# EAGLE board atommc3-th-panel (EAGLE 9.5.2)
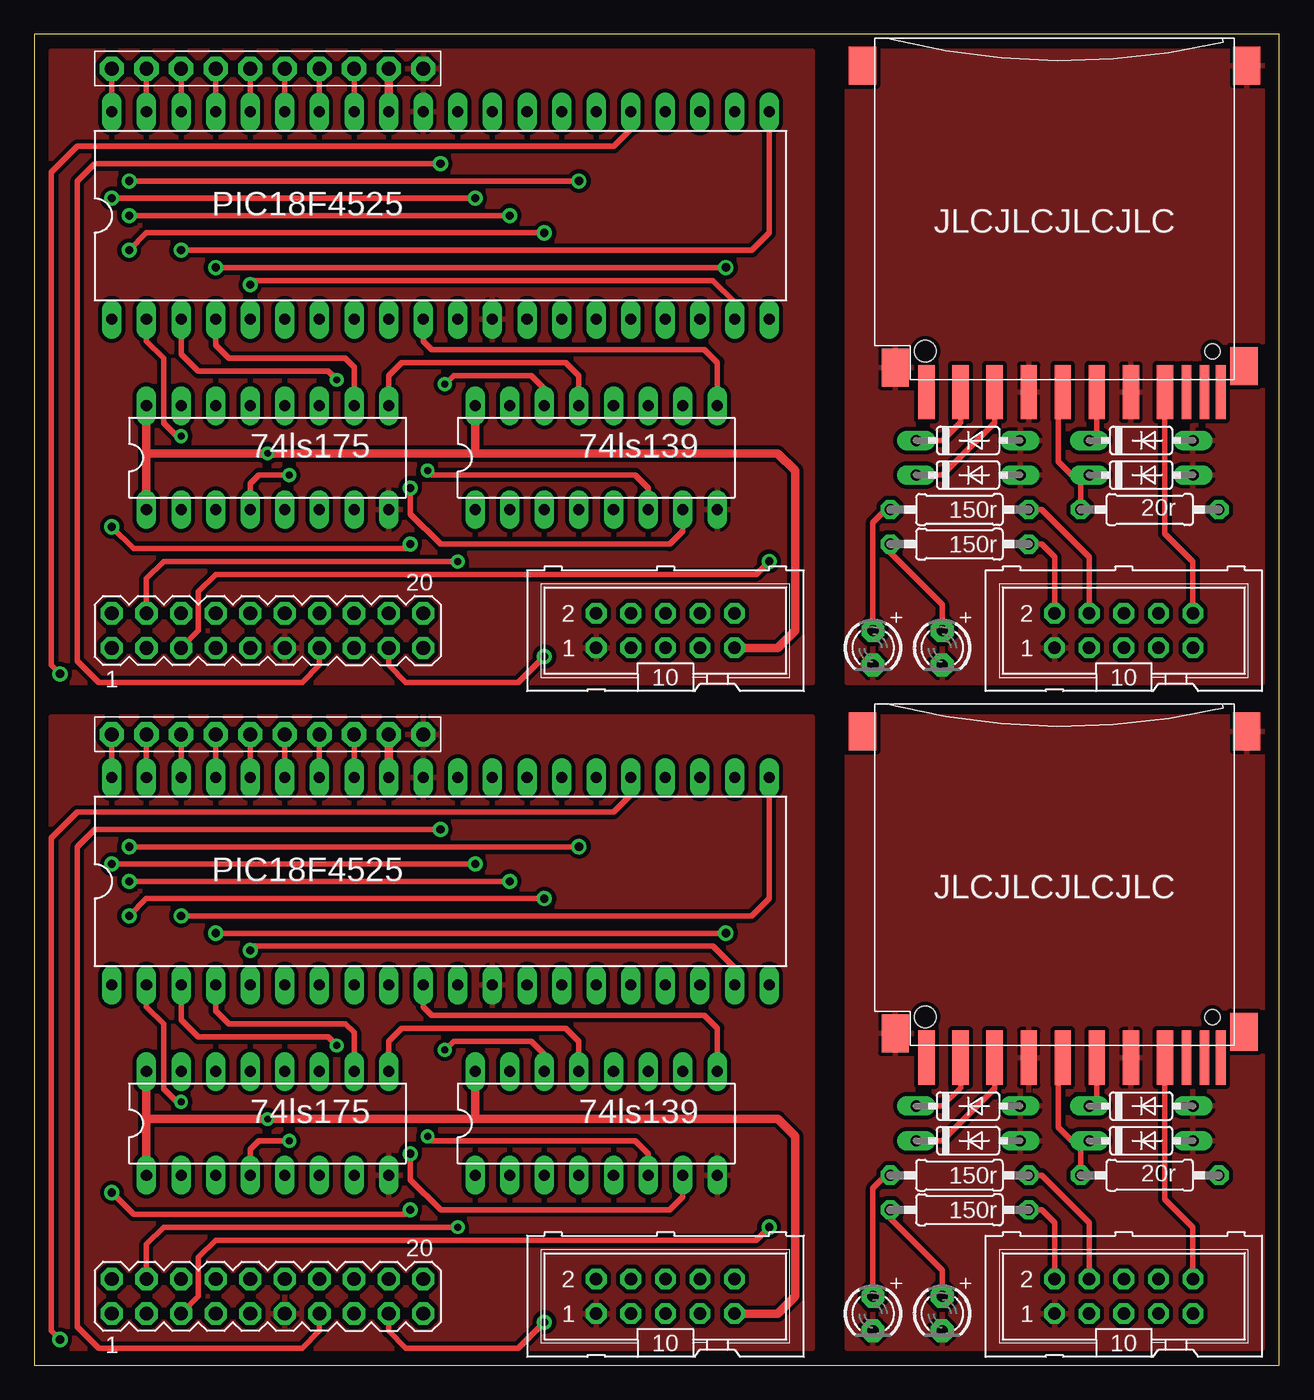
[diagram p0: board, top side]
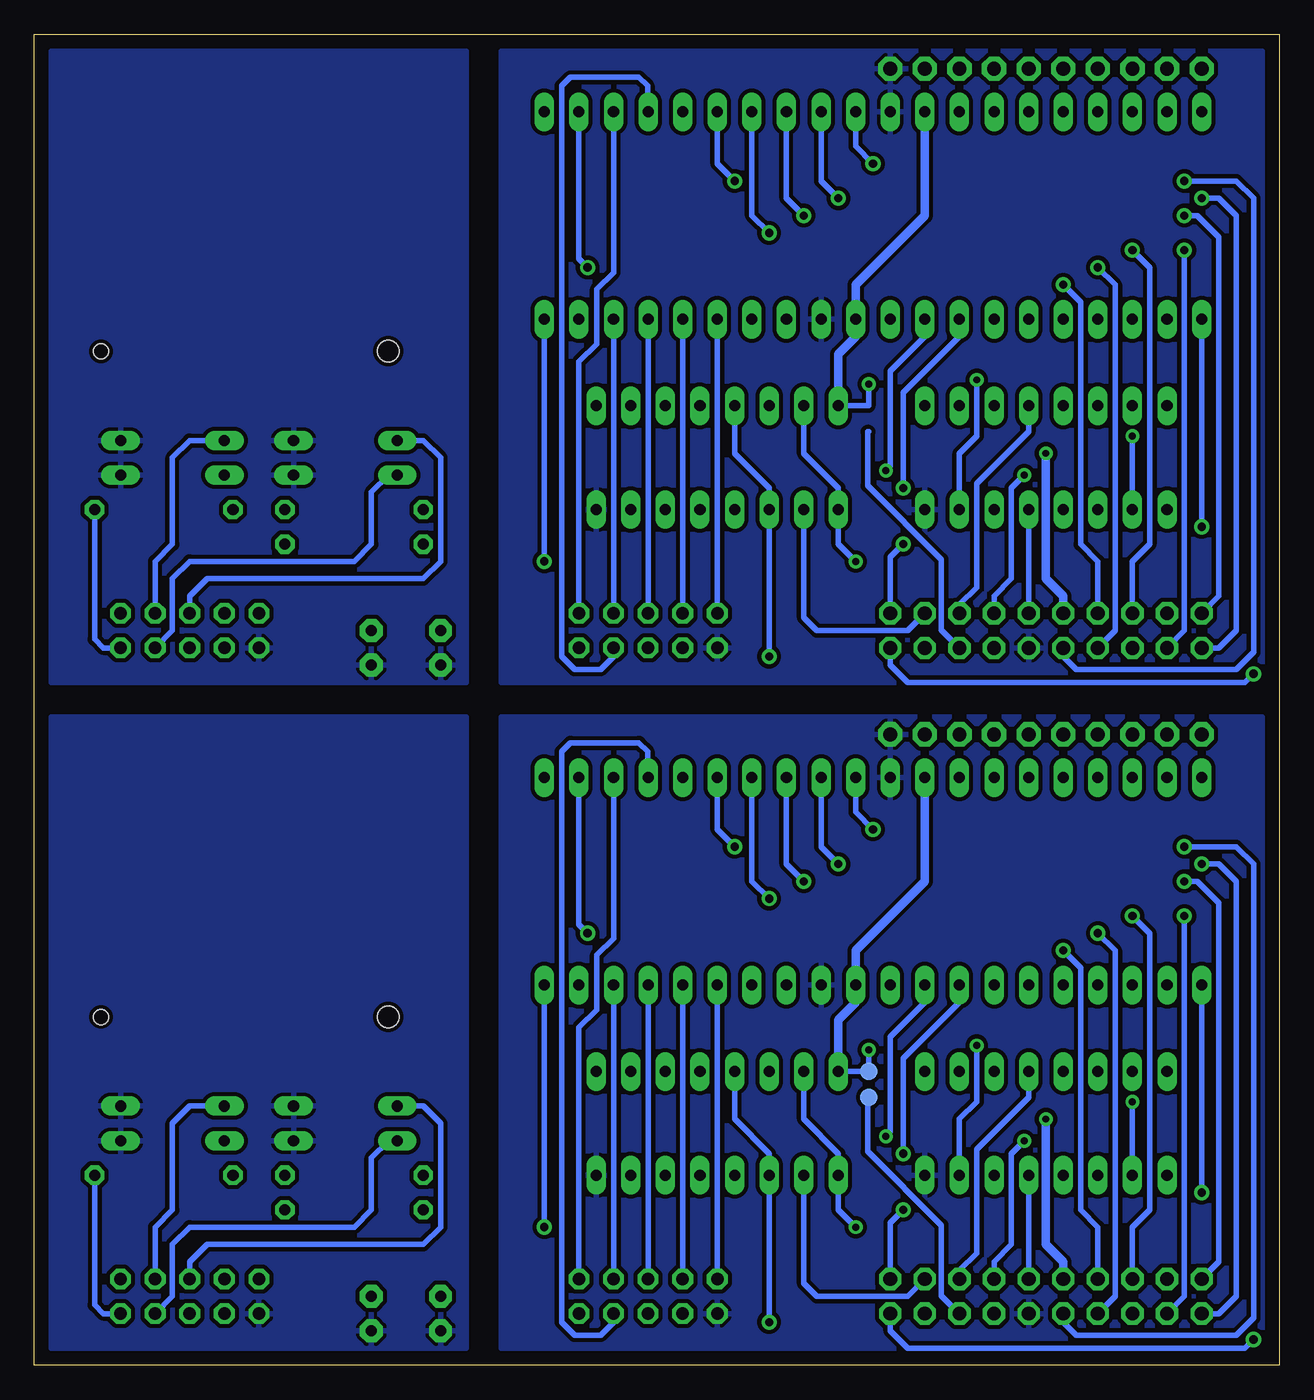
[diagram p1: board, bottom side, seen from below]

Size 91.44 x 97.79 mm. Coordinates in mm from the lower left corner, seen from the top.
Outline: 0,48.9 0,0 91.44,0 91.44,48.9 91.44,97.79 0,97.79 0,48.9
Copper layers (1*16): Top 0.035mm / dielectric 1.5mm / Bottom 0.035mm
Design rules "SparkFun": minimum track width 8mil, minimum drill 20mil, track to track 8mil, track to pad 8mil, pad to pad 8mil, via to via 8mil, smd to smd 8mil, copper to edge 10mil, drill to drill 8mil, minimum pad ring 12mil, minimum via ring 10mil, stop-mask expansion 4mil, vias tented up to drill 25mil, thermal gap 10mil

## Footprints (pad centres in the part's own frame; a part is rotated, then mirrored left to right if it is on the bottom)
DIODE_DO35-7 = drill 0.813 long: A 3.81,0; C -3.81,0
DIL16 = drill 0.813 long: 1 -8.89,-3.81; 2 -6.35,-3.81; 3 -3.81,-3.81; 4 -1.27,-3.81; 5 1.27,-3.81; 6 3.81,-3.81; 7 6.35,-3.81; 8 8.89,-3.81; 9 8.89,3.81; 10 6.35,3.81; 11 3.81,3.81; 12 1.27,3.81; 13 -1.27,3.81; 14 -3.81,3.81; 15 -6.35,3.81; 16 -8.89,3.81
DIL40 = drill 0.813 long: 1 -24.13,-7.62; 2 -21.59,-7.62; 3 -19.05,-7.62; 4 -16.51,-7.62; 5 -13.97,-7.62; 6 -11.43,-7.62; 7 -8.89,-7.62; 8 -6.35,-7.62; 9 -3.81,-7.62; 10 -1.27,-7.62; 11 1.27,-7.62; 12 3.81,-7.62; 13 6.35,-7.62; 14 8.89,-7.62; 15 11.43,-7.62; 16 13.97,-7.62; 17 16.51,-7.62; 18 19.05,-7.62; 19 21.59,-7.62; 20 24.13,-7.62; 21 24.13,7.62; 22 21.59,7.62; 23 19.05,7.62; 24 16.51,7.62; 25 13.97,7.62; 26 11.43,7.62; 27 8.89,7.62; 28 6.35,7.62; 29 3.81,7.62; 30 1.27,7.62; 31 -1.27,7.62; 32 -3.81,7.62; 33 -6.35,7.62; 34 -8.89,7.62; 35 -11.43,7.62; 36 -13.97,7.62; 37 -16.51,7.62; 38 -19.05,7.62; 39 -21.59,7.62; 40 -24.13,7.62
1X10-BIG = drill 1.016 pad 1.778 octagon: 1 -11.43,0; 2 -8.89,0; 3 -6.35,0; 4 -3.81,0; 5 -1.27,0; 6 1.27,0; 7 3.81,0; 8 6.35,0; 9 8.89,0; 10 11.43,0
LED3MM = drill 0.813 pad 1.676 octagon: A -1.27,0; K 1.27,0
0207/10 = drill 0.813 octagon: 1 -5.08,0; 2 5.08,0
ML10 = drill 0.914 octagon: 1 -5.08,-1.27; 2 -5.08,1.27; 3 -2.54,-1.27; 4 -2.54,1.27; 5 0,-1.27; 6 0,1.27; 7 2.54,-1.27; 8 2.54,1.27; 9 5.08,-1.27; 10 5.08,1.27
B1,27 = smd 1.27 x 1.27: TP 0,0
HEADER-M = drill 1.016 octagon: 1 -11.43,-1.27; 2 -11.43,1.27; 3 -8.89,-1.27; 4 -8.89,1.27; 5 -6.35,-1.27; 6 -6.35,1.27; 7 -3.81,-1.27; 8 -3.81,1.27; 9 -1.27,-1.27; 10 -1.27,1.27; 11 1.27,-1.27; 12 1.27,1.27; 13 3.81,-1.27; 14 3.81,1.27; 15 6.35,-1.27; 16 6.35,1.27; 17 8.89,-1.27; 18 8.89,1.27; 19 11.43,-1.27; 20 11.43,1.27
06132-MOD = smd 1.2 x 4: 1 6.9,13.6; 2 4.4,13.6; 3 1.9,13.6; 4 -0.6,13.6; 5 -3.1,13.6; 6 -5.6,13.6; 7 -8.1,13.6; 9 9.4,13.6 | smd 0.7 x 4: 8 -9.7,13.6; CD -11,13.6; WP -12.2,13.6 | smd 2 x 2.8: GP -14.117,-10.37; GP2 14.1,-10.37; GP3 11.7,11.8; GP4 -13.9,11.7 | hole 1.1: -11.6,10.6 | hole 1.6: 9.5,10.6

## Placement (x,y rotation side)
D1  3v3  [DIODE_DO35-7]  68.58,19.05 0 top
D2  3v3  [DIODE_DO35-7]  81.28,65.41 0 top
D3  3v3  [DIODE_DO35-7]  81.28,19.05 0 top
D4  3v3  [DIODE_DO35-7]  68.58,16.51 0 top
D5  3v3  [DIODE_DO35-7]  68.58,67.94 0 top
D6  3v3  [DIODE_DO35-7]  81.28,67.94 0 top
D7  3v3  [DIODE_DO35-7]  68.58,65.41 0 top
D9  3v3  [DIODE_DO35-7]  81.28,16.51 0 top
IC1  74AC139N  [DIL16]  41.27,17.78 0 top
IC2  74LS175N  [DIL16]  17.14,17.78 0 top
IC3  PIC16F874P  [DIL40]  29.84,84.45 0 top
IC4  PIC16F874P  [DIL40]  29.84,35.56 0 top
IC5  74AC139N  [DIL16]  41.27,66.67 0 top
IC6  74LS175N  [DIL16]  17.14,66.67 0 top
JP1  PINHD-1X10  [1X10-BIG]  17.14,46.35 0 top
JP2  PINHD-1X10  [1X10-BIG]  17.14,95.25 0 top
LED1  [LED3MM]  61.59,3.81 270 top
LED2  [LED3MM]  66.67,3.81 270 top
LED3  [LED3MM]  61.59,52.7 270 top
LED4  [LED3MM]  66.67,52.7 270 top
R1  20r  [0207/10]  67.94,13.97 180 top
R2  20r  [0207/10]  81.92,13.97 180 top
R3  20r  [0207/10]  67.94,11.43 180 top
R4  20r  [0207/10]  81.92,62.87 180 top
R5  20r  [0207/10]  67.94,62.87 180 top
R6  20r  [0207/10]  67.94,60.33 180 top
SV1  [ML10]  46.35,53.98 0 top
SV2  [ML10]  46.35,5.08 0 top
SV3  [ML10]  80.01,5.08 0 top
SV4  [ML10]  80.01,53.98 0 top
TP1  TPB1,27  [B1,27]  30.16,19.68 0 bottom
TP2  TPB1,27  [B1,27]  30.16,21.59 0 bottom
U$1  PL8-HEADER-MALE  [HEADER-M]  17.14,5.08 0 top
U$2  PL8-HEADER-MALE  [HEADER-M]  17.14,53.98 0 top
U$3  SDMMC06132-MOD  [06132-MOD]  74.93,85.09 180 top
U$4  SDMMC06132-MOD  [06132-MOD]  74.93,36.2 180 top

## Library data of the parts
D1-D7 D9 = eagle-ltspice; SPICEMODEL: diode; SPICEPREFIX: D
IC1 IC2 IC5 IC6 = 74xx-eu
IC3 IC4 = microchip
JP1 JP2 LED1-LED4 U$3 U$4 = adafruit
R1-R6 = resistor
SV1-SV4 = con-harting-ml
TP1 TP2 = testpad
U$1 U$2 = atom

## Nets
3V3ISH: D9.C R2.2 U$4.4
3V3ISH1: D2.C R4.2 U$3.4
!B1: IC5.1 IC5.15 U$2.4
!B400: IC1.1 IC1.15 U$1.4
!CD: U$4.CD
!CD1: U$3.CD
!IRQ: IC4.25 U$1.19
!IRQ1: IC3.25 U$2.19
!NMI: IC4.26 U$1.9
!NMI1: IC3.26 U$2.9
!PICEN: IC1.9 IC4.10
!PICEN1: IC3.10 IC5.9
!RD: IC1.7 IC4.8
!RD1: IC3.8 IC5.7
!RST: IC4.1 U$1.20
!RST1: IC3.1 U$2.20
!SS: IC4.17 SV2.6
!SS1: IC3.17 SV1.6
!SS-D: D1.C SV3.6 U$4.1
!SS-D1: D5.C SV4.6 U$3.1
!WR: IC1.6 IC4.9
!WR1: IC3.9 IC5.6
A0: IC2.4 U$1.14
A1: IC2.5 U$1.12
A2: IC2.12 U$1.16
A3: TP1.TP U$1.15
A4: IC6.4 U$2.14
A5: IC6.5 U$2.12
A6: IC6.12 U$2.16
A7: U$2.15
BSY: IC4.16 SV2.4
BSY1: IC3.16 SV1.4
BSY-D: R1.1 SV3.4
BSY-D1: R5.1 SV4.4
CLK: IC4.18 SV2.8
CLK1: IC3.18 SV1.8
CLK-D: D3.C SV3.8 U$4.5
CLK-D1: D6.C SV4.8 U$3.5
D0: IC4.19 U$1.8
D1: IC4.20 U$1.5
D2: IC4.21 U$1.6
D3: IC4.22 U$1.7
D4: IC4.27 U$1.3
D5: IC4.28 U$1.2
D6: IC4.29 U$1.1
D7: IC4.30 U$1.13
D8: IC3.30 U$2.13
D9: IC3.19 U$2.8
D10: IC3.20 U$2.5
D11: IC3.21 U$2.6
D12: IC3.22 U$2.7
D13: IC3.27 U$2.3
D14: IC3.28 U$2.2
D15: IC3.29 U$2.1
ERR: IC4.15 SV2.2
ERR1: IC3.15 SV1.2
ERR-D: R3.1 SV3.2
ERR-D1: R6.1 SV4.2
GND: IC1.8 IC2.8 IC4.12 IC4.31 JP1.10 SV2.1 U$1.11
GND1: IC3.12 IC3.31 IC5.8 IC6.8 JP2.10 SV1.1 U$2.11
GND-D: D1.A D3.A D4.A D9.A LED1.K LED2.K SV3.1 U$4.3 U$4.6 U$4.GP U$4.GP3
GND-D1: D2.A D5.A D6.A D7.A LED3.K LED4.K SV4.1 U$3.3 U$3.6 U$3.GP U$3.GP3
LA0: IC2.2 IC4.2
LA1: IC2.7 IC4.3
LA2: IC2.10 IC4.4
LA3: IC3.2 IC6.2
LA4: IC3.3 IC6.7
LA5: IC3.4 IC6.10
MISO: IC4.23 SV2.10
MISO1: IC3.23 SV1.10
MISO-D: SV3.10 U$4.7
MISO-D1: SV4.10 U$3.7
MOSI: IC4.24 SV2.7
MOSI1: IC3.24 SV1.7
MOSI-D: D4.C SV3.7 U$4.2
MOSI-D1: D7.C SV4.7 U$3.2
N$1: IC4.40 JP1.1
N$2: IC4.39 JP1.2
N$3: IC4.38 JP1.3
N$4: IC4.37 JP1.4
N$5: IC4.36 JP1.5
N$6: IC4.35 JP1.6
N$7: IC4.34 JP1.7
N$8: IC4.33 JP1.8
N$9: LED1.A R1.2
N$10: LED2.A R3.2
N$11: IC3.40 JP2.1
N$12: IC3.39 JP2.2
N$13: IC3.38 JP2.3
N$14: IC3.37 JP2.4
N$15: IC3.36 JP2.5
N$16: IC3.35 JP2.6
N$17: IC3.34 JP2.7
N$18: IC3.33 JP2.8
N$19: LED3.A R5.2
N$20: LED4.A R6.2
OSC1: IC4.13
OSC2: IC4.14
OSC3: IC3.13
OSC4: IC3.14
PHI1: IC5.3 IC5.13 IC6.9 U$2.17
PHI2: IC1.3 IC1.13 IC2.9 U$1.17
R/!WR: IC1.2 U$1.18
R/!WR1: IC5.2 U$2.18
VCC: IC1.14 IC1.16 IC2.1 IC2.16 IC4.11 IC4.32 JP1.9 SV2.9 TP2.TP U$1.10
VCC1: IC3.11 IC3.32 IC5.14 IC5.16 IC6.1 IC6.16 JP2.9 SV1.9 U$2.10
VCC-D: R2.1 SV3.9
VCC-D1: R4.1 SV4.9

## Tracks (layer width: path | path; a pad name or v marks a point on that pad's centre or on a via)
3V3ISH
  Top 0.406: U$4.4 75.21,22.28 75.21,17.5 76.2,16.51 D9.C 76.83,16.51 R2.2
3V3ISH1
  Top 0.406: U$3.4 75.21,71.17 75.21,66.39 76.2,65.41 D2.C 76.83,65.41 R4.2
!B1  (via drill 0.51)
  Top 0.406: U$2.4 8.26,57.78 9.53,59.05 v31.11,59.05
  Bottom 0.406: v31.11,59.05 32.38,60.33 IC5.1 32.38,64.45 34.92,66.99 IC5.15
!B400  (via drill 0.51)
  Top 0.406: U$1.4 8.26,8.89 9.53,10.16 v31.11,10.16
  Bottom 0.406: v31.11,10.16 32.38,11.43 IC1.1 32.38,15.56 34.92,18.1 IC1.15
!IRQ  (via drill 0.6)
  Top 0.406: IC4.25 43.81,41.91 42.55,40.64 3.17,40.64 1.27,38.73 1.27,2.54 v1.91,1.91
  Bottom 0.406: U$1.19 28.57,2.54 27.3,1.27 2.54,1.27 v1.91,1.91
!IRQ1  (via drill 0.6)
  Top 0.406: IC3.25 43.81,90.81 42.55,89.53 3.17,89.53 1.27,87.63 1.27,51.44 v1.91,50.8
  Bottom 0.406: U$2.19 28.57,51.44 27.3,50.16 2.54,50.16 v1.91,50.8
!NMI  (via drill 0.6)
  Top 0.406: v6.99,38.1 v40.01,38.1
  Bottom 0.406: U$1.9 15.88,3.17 14.92,2.22 3.17,2.22 1.91,3.49 1.91,36.83 3.17,38.1 v6.99,38.1 | v40.01,38.1 41.27,39.37 IC4.26
!NMI1  (via drill 0.6)
  Top 0.406: v6.99,87 v40.01,87
  Bottom 0.406: U$2.9 15.88,52.07 14.92,51.12 3.17,51.12 1.91,52.39 1.91,85.72 3.17,87 v6.99,87 | v40.01,87 41.27,88.27 IC3.26
!PICEN
  Top 0.406: IC1.9 50.16,24.77 49.21,25.72 29.21,25.72 28.57,26.35 IC4.10
!PICEN1
  Top 0.406: IC5.9 50.16,73.66 49.21,74.61 29.21,74.61 28.57,75.25 IC3.10
!RD  (via drill 0.6)
  Top 0.406: v27.62,15.56 27.62,13.65 29.84,11.43 46.67,11.43 47.62,12.38 IC1.7
  Bottom 0.406: IC4.8 23.5,26.67 27.62,22.54 v27.62,15.56
!RD1  (via drill 0.6)
  Top 0.406: v27.62,64.45 27.62,62.55 29.84,60.33 46.67,60.33 47.62,61.28 IC5.7
  Bottom 0.406: IC3.8 23.5,75.56 27.62,71.44 v27.62,64.45
!RST  (via drill 0.6)
  Top 0.406: v5.71,12.7 7.3,11.11 27.3,11.11 v27.62,11.43
  Bottom 0.406: v27.62,11.43 28.57,10.48 U$1.20 | v5.71,12.7 IC4.1
!RST1  (via drill 0.6)
  Top 0.406: v5.71,61.59 7.3,60.01 27.3,60.01 v27.62,60.33
  Bottom 0.406: v27.62,60.33 28.57,59.37 U$2.20 | v5.71,61.59 IC3.1
!SS
  Bottom 0.406: IC4.17 SV2.6
!SS1
  Bottom 0.406: IC3.17 SV1.6
!SS-D
  Top 0.406: U$4.1 68.03,20.41 66.67,19.05 D1.C
  Bottom 0.406: SV3.6 80.01,7.62 78.74,8.89 62.87,8.89 61.59,10.16 61.59,17.78 62.87,19.05 D1.C
!SS-D1
  Top 0.406: U$3.1 68.03,69.3 66.67,67.94 D5.C
  Bottom 0.406: SV4.6 80.01,56.52 78.74,57.78 62.87,57.78 61.59,59.05 61.59,66.67 62.87,67.94 D5.C
!WR  (via drill 0.51)
  Top 0.406: v28.89,16.83 29.21,16.51 44.13,16.51 45.09,15.56 IC1.6
  Bottom 0.406: IC4.9 26.04,26.67 28.57,24.13 28.57,17.14 v28.89,16.83
!WR1  (via drill 0.51)
  Top 0.406: v28.89,65.72 29.21,65.41 44.13,65.41 45.09,64.45 IC5.6
  Bottom 0.406: IC3.9 26.04,75.56 28.57,73.03 28.57,66.04 v28.89,65.72
A0  (via drill 0.51)
  Top 0.406: IC2.4 15.88,15.88 16.51,16.51 v18.73,16.51
  Bottom 0.406: U$1.14 20.95,7.62 19.68,8.89 19.68,15.56 v18.73,16.51
A1
  Bottom 0.406: U$1.12 IC2.5
A2
  Bottom 0.406: IC2.12 18.41,19.68 22.23,15.88 22.23,8.26 23.5,6.99 U$1.16
A3
  Bottom 0.406: TP1.TP 30.24,19.68 30.24,15.73 24.82,10.3 24.82,5.13 U$1.15
A4  (via drill 0.51)
  Top 0.406: IC6.4 15.88,64.77 16.51,65.41 v18.73,65.41
  Bottom 0.406: U$2.14 20.95,56.52 19.68,57.78 19.68,64.45 v18.73,65.41
A5
  Bottom 0.406: U$2.12 IC6.5
A6
  Bottom 0.406: IC6.12 18.41,68.58 22.23,64.77 22.23,57.15 23.5,55.88 U$2.16
A7
  Bottom 0.406: 30.16,68.58 30.24,68.58 30.24,64.62 24.82,59.19 24.82,54.03 U$2.15
BSY
  Bottom 0.406: IC4.16 SV2.4
BSY1
  Bottom 0.406: IC3.16 SV1.4
BSY-D
  Top 0.406: R1.1 73.98,13.97 77.47,10.48 SV3.4
BSY-D1
  Top 0.406: R5.1 73.98,62.87 77.47,59.37 SV4.4
CLK
  Bottom 0.406: IC4.18 SV2.8
CLK1
  Bottom 0.406: IC3.18 SV1.8
CLK-D
  Top 0.406: D3.C 78.03,19.61 U$4.5
  Bottom 0.406: D3.C 80.01,19.05 81.28,17.78 81.28,11.43 82.55,10.16 SV3.8
CLK-D1
  Top 0.406: D6.C 78.03,68.5 U$3.5
  Bottom 0.406: D6.C 80.01,67.94 81.28,66.67 81.28,60.33 82.55,59.05 SV4.8
D0  (via drill 0.6)
  Top 0.406: v15.88,30.48 16.19,30.8 49.85,30.8 51.44,29.21 IC4.19
  Bottom 0.406: U$1.8 13.34,10.16 14.61,11.43 14.61,29.21 v15.88,30.48
D1  (via drill 0.61)
  Top 0.406: v53.98,10.16 53.02,9.21 13.34,9.21 12.06,7.94 12.06,5.08 U$1.5
  Bottom 0.406: IC4.20 v53.98,10.16
D2  (via drill 0.6)
  Top 0.406: v10.79,33.02 52.7,33.02 53.98,34.29 IC4.21
  Bottom 0.406: U$1.6 10.79,10.16 9.53,11.43 9.53,31.75 v10.79,33.02
D3  (via drill 0.6)
  Top 0.406: v13.34,31.75 v50.8,31.75
  Bottom 0.406: U$1.7 12.06,5.08 12.06,30.48 v13.34,31.75 | v50.8,31.75 51.44,32.38 IC4.22
D4  (via drill 0.6)
  Top 0.406: v6.99,33.02 8.26,34.29 v37.47,34.29
  Bottom 0.406: U$1.3 6.99,5.08 v6.99,33.02 | v37.47,34.29 38.73,35.56 IC4.27
D5  (via drill 0.6)
  Top 0.406: v6.99,35.56 v34.92,35.56
  Bottom 0.406: U$1.2 4.45,7.62 4.45,33.97 6.03,35.56 v6.99,35.56 | v34.92,35.56 36.2,36.83 IC4.28
D6  (via drill 0.6)
  Top 0.406: v5.71,36.83 v32.38,36.83
  Bottom 0.406: U$1.1 4.45,3.81 3.17,5.08 3.17,35.56 4.45,36.83 v5.71,36.83 | IC4.29 33.66,38.1 v32.38,36.83
D7  (via drill 0.6)
  Top 0.406: U$1.13 20.95,2.54 19.68,1.27 4.76,1.27 3.17,2.86 3.17,38.1 4.45,39.37 v29.84,39.37
  Bottom 0.406: v29.84,39.37 31.11,40.64 IC4.30
D8  (via drill 0.6)
  Top 0.406: U$2.13 20.95,51.44 19.68,50.16 4.76,50.16 3.17,51.75 3.17,87 4.45,88.27 v29.84,88.27
  Bottom 0.406: v29.84,88.27 31.11,89.53 IC3.30
D9  (via drill 0.6)
  Top 0.406: v15.88,79.38 16.19,79.69 49.85,79.69 51.44,78.11 IC3.19
  Bottom 0.406: U$2.8 13.34,59.05 14.61,60.33 14.61,78.11 v15.88,79.38
D10  (via drill 0.61)
  Top 0.406: v53.98,59.05 53.02,58.1 13.34,58.1 12.06,56.83 12.06,53.98 U$2.5
  Bottom 0.406: IC3.20 v53.98,59.05
D11  (via drill 0.6)
  Top 0.406: v10.79,81.92 52.7,81.92 53.98,83.19 IC3.21
  Bottom 0.406: U$2.6 10.79,59.05 9.53,60.33 9.53,80.64 v10.79,81.92
D12  (via drill 0.6)
  Top 0.406: v13.34,80.64 v50.8,80.64
  Bottom 0.406: U$2.7 12.06,53.98 12.06,79.38 v13.34,80.64 | v50.8,80.64 51.44,81.28 IC3.22
D13  (via drill 0.6)
  Top 0.406: v6.99,81.92 8.26,83.19 v37.47,83.19
  Bottom 0.406: U$2.3 6.99,53.98 v6.99,81.92 | v37.47,83.19 38.73,84.45 IC3.27
D14  (via drill 0.6)
  Top 0.406: v6.99,84.45 v34.92,84.45
  Bottom 0.406: U$2.2 4.45,56.52 4.45,82.87 6.03,84.45 v6.99,84.45 | v34.92,84.45 36.2,85.72 IC3.28
D15  (via drill 0.6)
  Top 0.406: v5.71,85.72 v32.38,85.72
  Bottom 0.406: U$2.1 4.45,52.7 3.17,53.98 3.17,84.45 4.45,85.72 v5.71,85.72 | IC3.29 33.66,87 v32.38,85.72
ERR
  Bottom 0.406: IC4.15 SV2.2
ERR1
  Bottom 0.406: IC3.15 SV1.2
ERR-D
  Top 0.406: SV3.2 74.93,10.48 73.98,11.43 R3.1
ERR-D1
  Top 0.406: SV4.2 74.93,59.37 73.98,60.33 R6.1
GND
  pour Top (isolate 0.305): 1.27,47.62 1.27,1.27 57.15,1.27 57.15,47.62
  pour Bottom (isolate 0.305): 1.27,47.62 1.27,1.27 57.15,1.27 57.15,47.62
GND1
  pour Top (isolate 0.305): 1.27,96.52 1.27,50.16 57.15,50.16 57.15,96.52
  pour Bottom (isolate 0.305): 1.27,96.52 1.27,50.16 57.15,50.16 57.15,96.52
GND-D
  pour Top (isolate 0.305): 59.69,47.62 59.69,1.27 90.17,1.27 90.17,47.62
  pour Bottom (isolate 0.305): 59.69,47.62 90.17,47.62 90.17,1.27 59.69,1.27
GND-D1
  pour Top (isolate 0.305): 59.69,96.52 59.69,50.16 90.17,50.16 90.17,96.52
  pour Bottom (isolate 0.305): 59.69,96.52 90.17,96.52 90.17,50.16 59.69,50.16
LA0  (via drill 0.51)
  Top 0.406: IC4.2 8.26,26.35 9.53,25.08 9.53,20.32 10.48,19.37 v10.79,19.37
  Bottom 0.406: v10.79,19.37 IC2.2
LA1  (via drill 0.51)
  Top 0.406: IC4.3 10.79,25.4 12.06,24.13 21.59,24.13 v22.23,23.5
  Bottom 0.406: IC2.7 23.5,18.1 22.23,19.37 v22.23,23.5
LA2
  Top 0.406: IC4.4 13.34,26.04 14.29,25.08 22.86,25.08 23.5,24.45 IC2.10
LA3  (via drill 0.51)
  Top 0.406: IC3.2 8.26,75.25 9.53,73.98 9.53,69.22 10.48,68.26 v10.79,68.26
  Bottom 0.406: v10.79,68.26 IC6.2
LA4  (via drill 0.51)
  Top 0.406: IC3.3 10.79,74.3 12.06,73.03 21.59,73.03 v22.23,72.39
  Bottom 0.406: IC6.7 23.5,66.99 22.23,68.26 v22.23,72.39
LA5
  Top 0.406: IC3.4 13.34,74.93 14.29,73.98 22.86,73.98 23.5,73.34 IC6.10
MISO
  Bottom 0.406: SV2.10 51.44,24.82 50.12,26.13 50.12,30.15 48.9,31.38 IC4.23
MISO1
  Bottom 0.406: SV1.10 51.44,73.71 50.12,75.03 50.12,79.05 48.9,80.27 IC3.23
MISO-D
  Top 0.406: SV3.10 85.09,10.16 83.03,12.22 U$4.7
MISO-D1
  Top 0.406: SV4.10 85.09,59.05 83.03,61.12 U$3.7
MOSI
  Bottom 0.406: SV2.7 48.9,3.17 49.85,2.22 51.75,2.22 52.7,3.17 52.7,45.09 52.07,45.72 47.03,45.72 46.39,45.09 46.39,43.22 IC4.24
MOSI1
  Bottom 0.406: SV1.7 48.9,52.07 49.85,51.12 51.75,51.12 52.7,52.07 52.7,93.98 52.07,94.61 47.03,94.61 46.39,93.98 46.39,92.11 IC3.24
MOSI-D
  Top 0.406: U$4.2 70.53,20.36 66.67,16.51 D4.C
  Bottom 0.406: SV3.7 81.28,5.08 81.28,8.89 80.01,10.16 67.94,10.16 66.67,11.43 66.67,15.24 65.41,16.51 D4.C
MOSI-D1
  Top 0.406: U$3.2 70.53,69.26 66.67,65.41 D7.C
  Bottom 0.406: SV4.7 81.28,53.98 81.28,57.78 80.01,59.05 67.94,59.05 66.67,60.33 66.67,64.14 65.41,65.41 D7.C
N$1
  Top 0.406: JP1.1 IC4.40
N$2
  Top 0.406: JP1.2 IC4.39
N$3
  Top 0.406: JP1.3 IC4.38
N$4
  Top 0.406: JP1.4 IC4.37
N$5
  Top 0.406: JP1.5 IC4.36
N$6
  Top 0.406: JP1.6 IC4.35
N$7
  Top 0.406: JP1.7 IC4.34
N$8
  Top 0.406: IC4.33 JP1.8
N$9
  Top 0.406: LED1.A 61.59,13.02 62.55,13.97 R1.2
N$10
  Top 0.406: R3.2 62.87,10.79 66.67,6.99 LED2.A
N$11
  Top 0.406: JP2.1 IC3.40
N$12
  Top 0.406: JP2.2 IC3.39
N$13
  Top 0.406: JP2.3 IC3.38
N$14
  Top 0.406: JP2.4 IC3.37
N$15
  Top 0.406: JP2.5 IC3.36
N$16
  Top 0.406: JP2.6 IC3.35
N$17
  Top 0.406: JP2.7 IC3.34
N$18
  Top 0.406: IC3.33 JP2.8
N$19
  Top 0.406: LED3.A 61.59,61.91 62.55,62.87 R5.2
N$20
  Top 0.406: R6.2 62.87,59.69 66.67,55.88 LED4.A
PHI1  (via drill 0.61)
  Top 0.406: U$2.17 26.04,51.44 27.3,50.16 35.56,50.16 v37.47,52.07 | IC5.13 40.01,72.71 39.05,73.66 26.99,73.66 26.04,72.71 IC6.9
  Bottom 0.406: v37.47,52.07 IC5.3 37.47,64.45 40.01,66.99 IC5.13
PHI2  (via drill 0.61)
  Top 0.406: U$1.17 26.04,2.54 27.3,1.27 35.56,1.27 v37.47,3.17 | IC1.13 40.01,23.81 39.05,24.77 26.99,24.77 26.04,23.81 IC2.9
  Bottom 0.406: v37.47,3.17 IC1.3 37.47,15.56 40.01,18.1 IC1.13
R/!WR
  Bottom 0.406: U$1.18 27.3,5.08 33.97,5.08 34.92,6.03 IC1.2
R/!WR1
  Bottom 0.406: U$2.18 27.3,53.98 33.97,53.98 34.92,54.93 IC5.2
VCC  (via drill 0.51)
  Top 0.406: IC1.14 37.47,22.86 36.51,23.81 30.8,23.81 v30.16,23.18
  Top 0.61: 32.38,18.1 v17.14,18.1 8.26,18.1 | JP1.9 IC4.32 | SV2.9 54.61,3.81 55.88,5.08 55.88,16.83 54.61,18.1 32.38,18.1 | IC1.16 32.38,18.1 | IC2.16 8.26,18.1 | 8.26,18.1 IC2.1
  Bottom 0.406: v30.16,23.18 TP2.TP IC1.16
  Bottom 0.61: IC4.32 26.04,35.56 31.11,30.48 IC4.11 31.11,26.67 32.38,25.4 IC1.16 | U$1.10 15.88,7.62 17.14,8.89 v17.14,18.1
VCC1  (via drill 0.51)
  Top 0.406: IC5.14 37.47,71.75 36.51,72.71 30.8,72.71 v30.16,72.07
  Top 0.61: 32.38,66.99 v17.14,66.99 8.26,66.99 | JP2.9 IC3.32 | SV1.9 54.61,52.7 55.88,53.98 55.88,65.72 54.61,66.99 32.38,66.99 | IC5.16 32.38,66.99 | IC6.16 8.26,66.99 | 8.26,66.99 IC6.1
  Bottom 0.406: v30.16,72.07 30.16,70.48 IC5.16
  Bottom 0.61: IC3.32 26.04,84.45 31.11,79.38 IC3.11 31.11,75.56 32.38,74.3 IC5.16 | U$2.10 15.88,56.52 17.14,57.78 v17.14,66.99
VCC-D
  Bottom 0.406: R2.1 87,4.45 86.36,3.81 SV3.9
VCC-D1
  Bottom 0.406: R4.1 87,53.34 86.36,52.7 SV4.9

## Text on the board
tPlace: 150r | 20r | 150r | 150r | 20r | 150r
tNames: PIC18F4525 | JLCJLCJLCJLC | 74ls175 | 74ls139 | PIC18F4525 | JLCJLCJLCJLC | 74ls175 | 74ls139
Vscore: - v-cut | - v-cut